# EAGLE board SparkFun_Ultrasonic_Sensor-Panel (EAGLE 9.6.2), part 1 of 5
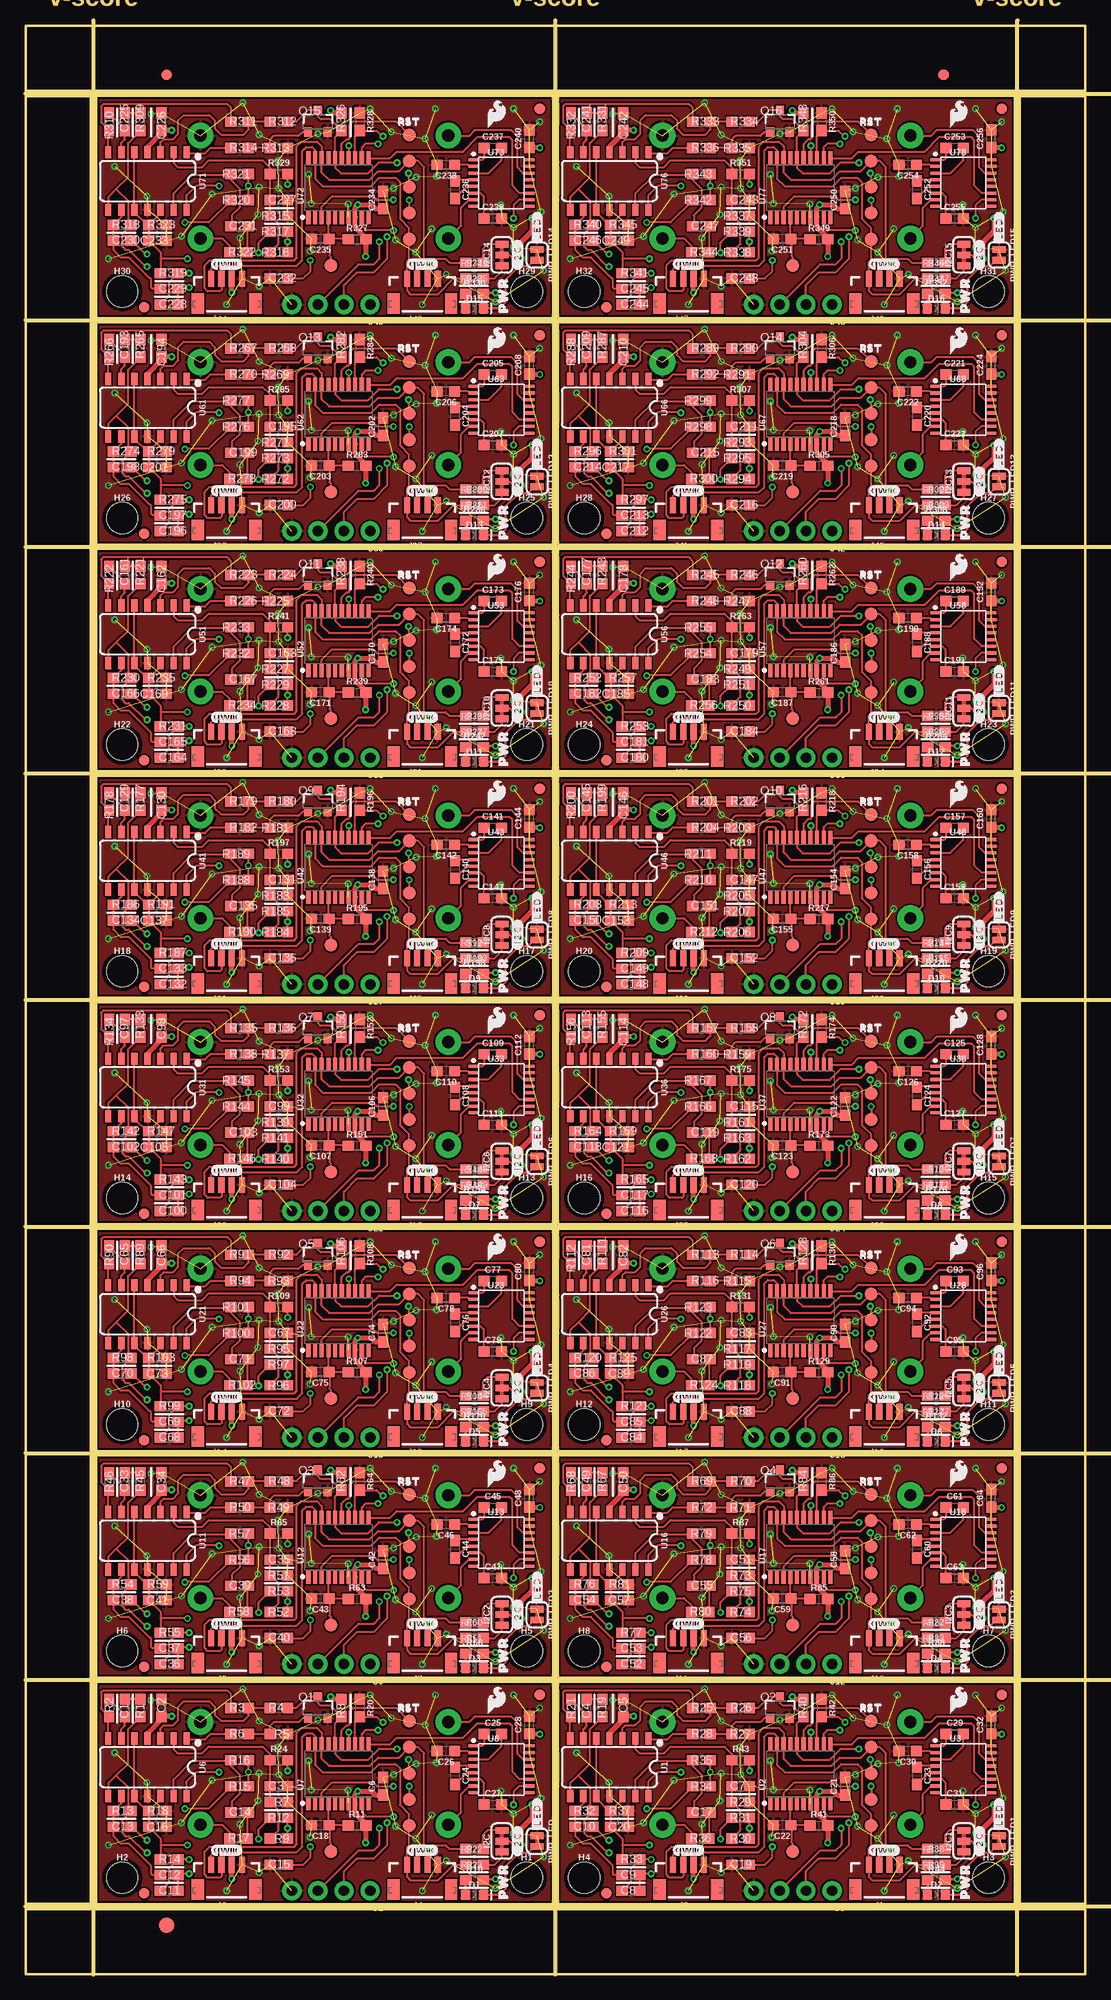
[diagram p0: board, top side]
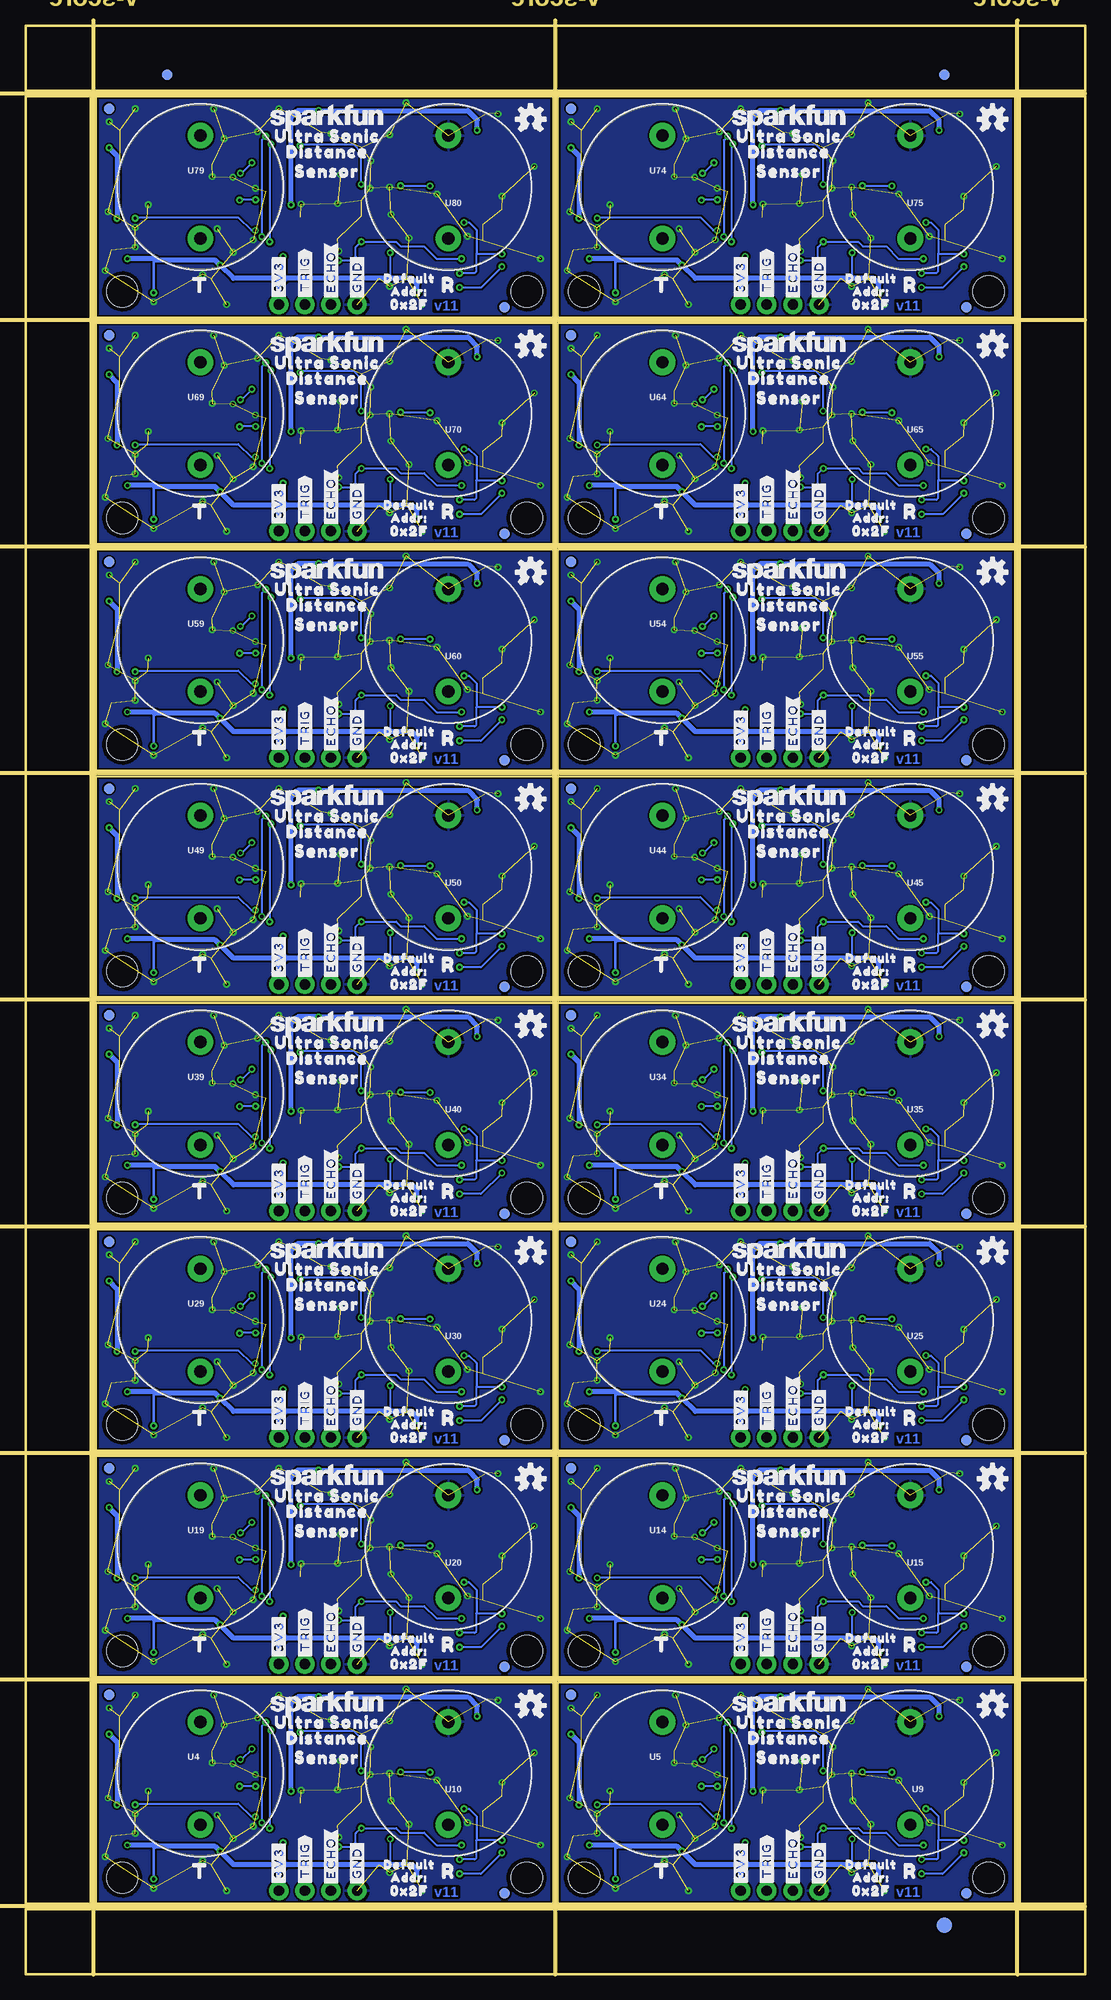
[diagram p1: board, bottom side, seen from below]

Size 103.12 x 189.59 mm. Coordinates in mm from the lower left corner, seen from the top.
Outline: 6.86,6.86 51.31,6.86 51.31,28.4 6.86,28.4 6.86,6.86
Outline: 51.82,6.86 96.27,6.86 96.27,28.4 51.82,28.4 51.82,6.86
Outline: 6.86,28.91 51.31,28.91 51.31,50.44 6.86,50.44 6.86,28.91
Outline: 51.82,28.91 96.27,28.91 96.27,50.44 51.82,50.44 51.82,28.91
Outline: 6.86,50.95 51.31,50.95 51.31,72.49 6.86,72.49 6.86,50.95
Outline: 51.82,50.95 96.27,50.95 96.27,72.49 51.82,72.49 51.82,50.95
Outline: 6.86,73 51.31,73 51.31,94.54 6.86,94.54 6.86,73
Outline: 51.82,73 96.27,73 96.27,94.54 51.82,94.54 51.82,73
Outline: 6.86,95.05 51.31,95.05 51.31,116.59 6.86,116.59 6.86,95.05
Outline: 51.82,95.05 96.27,95.05 96.27,116.59 51.82,116.59 51.82,95.05
Outline: 6.86,117.09 51.31,117.09 51.31,138.63 6.86,138.63 6.86,117.09
Outline: 51.82,117.09 96.27,117.09 96.27,138.63 51.82,138.63 51.82,117.09
Outline: 6.86,139.14 51.31,139.14 51.31,160.68 6.86,160.68 6.86,139.14
Outline: 51.82,139.14 96.27,139.14 96.27,160.68 51.82,160.68 51.82,139.14
Outline: 6.86,161.19 51.31,161.19 51.31,182.73 6.86,182.73 6.86,161.19
Outline: 51.82,161.19 96.27,161.19 96.27,182.73 51.82,182.73 51.82,161.19
Outline: 0,6.35 103.12,6.35 103.12,0 0,0 0,6.35
Outline: 96.77,182.73 103.12,182.73 103.12,6.86 96.77,6.86 96.77,182.73
Outline: 0,189.59 103.12,189.59 103.12,183.24 0,183.24 0,189.59
Outline: 0,182.73 6.35,182.73 6.35,6.86 0,6.86 0,182.73
Copper layers (1+16): Top 0.035559375mm / dielectric 0.47751875mm / Bottom 0.035559375mm
Design rules "SparkFun_Ultrasonic_Sensor": minimum track width 7mil, minimum drill 12mil, track to track 7mil, track to pad 7mil, pad to pad 7mil, via to via 7mil, smd to smd 7mil, copper to edge 7mil, drill to drill 7mil, minimum pad ring 7mil, minimum via ring 7mil, stop-mask expansion 3mil, vias tented up to drill 25mil, thermal gap 10mil
Milling: 12 lines

## Footprints (pad centres in the part's own frame; a part is rotated, then mirrored left to right if it is on the bottom)
0603 = smd 1.1 x 1: 1 -0.85,0; 2 0.85,0
LED-0603 = smd 1 x 1: A -0.877,0; C 0.877,0
FIDUCIAL-1X2 = smd 1 x 1: 1 0,0
FIDUCIAL-1.5X3 = smd 1.5 x 1.5: 1 0,0
STAND-OFF-TIGHT = hole 3.048: 0,0
SMT-JUMPER_3_2-NC_TRACE_SILK = smd 0.66 x 1.27: 1 -1.041,0; 2 0,0; 3 1.041,0
JST04_1MM_VERT = smd 0.6 x 1.55: 1 -1.5,0.775; 2 -0.5,0.775; 3 0.5,0.775; 4 1.5,0.775 | smd 1.2 x 2: NC1 -2.8,3.2; NC2 2.8,3.2
1X04_NO_SILK = drill 1.016 pad 1.88: 1 0,0; 2 2.54,0; 3 5.08,0; 4 7.62,0
SMT-JUMPER_2_NC_TRACE_SILK = smd 0.66 x 1.27: 1 -0.521,0; 2 0.521,0
SOT23-3 = smd 0.8 x 0.9: 1 -0.95,-1; 2 0.95,-1; 3 0,1.1
PAD.03X.05 = smd 1.27 x 1.27: 1 0,0
SO14 = smd 0.6 x 1.2: 1 -3.175,-2.8; 2 -1.905,-2.8; 3 -0.635,-2.8; 4 0.635,-2.8; 5 1.905,-2.8; 6 3.175,-2.8; 7 4.445,-2.8; 8 4.445,2.8; 9 3.175,2.8; 10 1.905,2.8; 11 0.635,2.8; 12 -0.635,2.8; 13 -1.905,2.8; 14 -3.175,2.8
TSSOP20 = smd 1.35 x 0.4: P1 -2.911,2.878; P2 -2.911,2.228; P3 -2.911,1.578; P4 -2.911,0.928; P5 -2.911,0.278; P6 -2.911,-0.372; P7 -2.911,-1.022; P8 -2.911,-1.672; P9 -2.911,-2.322; P10 -2.911,-2.972; P11 2.839,-2.972; P12 2.839,-2.322; P13 2.839,-1.672; P14 2.839,-1.022; P15 2.839,-0.372; P16 2.839,0.278; P17 2.839,0.928; P18 2.839,1.578; P19 2.839,2.228; P20 2.839,2.878
TSSOP16 = smd 1 x 0.3: P1 -2.607,2.153; P2 -2.607,1.503; P3 -2.607,0.853; P4 -2.607,0.203; P5 -2.607,-0.447; P6 -2.607,-1.097; P7 -2.607,-1.747; P8 -2.607,-2.397; P9 2.793,-2.397; P10 2.793,-1.747; P11 2.793,-1.097; P12 2.793,-0.447; P13 2.793,0.203; P14 2.793,0.853; P15 2.793,1.503; P16 2.793,2.153
CUSA-T80 = drill 1.2 pad 2.5: P1 0,5; P2 0,-5
CUSA-R80 = drill 1.2 pad 2.5: P1 0,5; P2 0,-5

## Placement (x,y rotation side)
C1  10nF  [0603]  9.65,25.91 90 top
C2  1.0uF  [0603]  13.21,25.91 270 top
C3  1nF  [0603]  24.64,18.29 0 top
C4  10nF  [0603]  54.61,25.91 90 top
C5  1.0uF  [0603]  58.17,25.91 270 top
C6  0.1uF  [0603]  34.8,18.29 90 top
C7  1nF  [0603]  69.6,18.29 0 top
C8  1nF  [0603]  58.93,8.13 0 top
C9  68pF  [0603]  58.93,9.65 0 top
C10  1nF  [0603]  54.36,14.35 0 top
C11  1nF  [0603]  13.97,8.13 0 top
C12  68pF  [0603]  13.97,9.65 0 top
C13  1nF  [0603]  9.4,14.35 0 top
C14  10nF  [0603]  20.83,15.75 0 top
C15  1.0uF  [0603]  24.64,10.67 0 top
C16  1nF  [0603]  12.83,14.35 180 top
C17  10nF  [0603]  65.79,15.75 0 top
C18  0.1uF  [0603]  28.68,14.5 180 top
C19  1.0uF  [0603]  69.6,10.67 0 top
C20  1nF  [0603]  57.78,14.35 180 top
C21  0.1uF  [0603]  79.76,18.29 90 top
C22  0.1uF  [0603]  73.63,14.5 180 top
C23  0.1uF  [0603]  86.74,19.3 270 top
C24  0.1uF  [0603]  41.78,19.3 270 top
C25  0.1uF  [0603]  45.47,23.37 0 top
C26  0.1uF  [0603]  40.89,21.72 180 top
C27  0.1uF  [0603]  45.47,16.51 0 top
C28  0.1uF  [0603]  49.02,24.26 90 top
C29  0.1uF  [0603]  90.42,23.37 0 top
C30  0.1uF  [0603]  85.85,21.72 180 top
C31  0.1uF  [0603]  90.42,16.51 0 top
C32  0.1uF  [0603]  93.98,24.26 90 top
C33  10nF  [0603]  9.65,47.96 90 top
C34  1.0uF  [0603]  13.21,47.96 270 top
C35  1nF  [0603]  24.64,40.34 0 top
C36  1nF  [0603]  13.97,30.18 0 top
C37  68pF  [0603]  13.97,31.7 0 top
C38  1nF  [0603]  9.4,36.4 0 top
C39  10nF  [0603]  20.83,37.8 0 top
C40  1.0uF  [0603]  24.64,32.72 0 top
C41  1nF  [0603]  12.83,36.4 180 top
C42  0.1uF  [0603]  34.8,40.34 90 top
C43  0.1uF  [0603]  28.68,36.55 180 top
C44  0.1uF  [0603]  41.78,41.35 270 top
C45  0.1uF  [0603]  45.47,45.42 0 top
C46  0.1uF  [0603]  40.89,43.76 180 top
C47  0.1uF  [0603]  45.47,38.56 0 top
C48  0.1uF  [0603]  49.02,46.3 90 top
C49  10nF  [0603]  54.61,47.96 90 top
C50  1.0uF  [0603]  58.17,47.96 270 top
C51  1nF  [0603]  69.6,40.34 0 top
C52  1nF  [0603]  58.93,30.18 0 top
C53  68pF  [0603]  58.93,31.7 0 top
C54  1nF  [0603]  54.36,36.4 0 top
C55  10nF  [0603]  65.79,37.8 0 top
C56  1.0uF  [0603]  69.6,32.72 0 top
C57  1nF  [0603]  57.78,36.4 180 top
C58  0.1uF  [0603]  79.76,40.34 90 top
C59  0.1uF  [0603]  73.63,36.55 180 top
C60  0.1uF  [0603]  86.74,41.35 270 top
C61  0.1uF  [0603]  90.42,45.42 0 top
C62  0.1uF  [0603]  85.85,43.76 180 top
C63  0.1uF  [0603]  90.42,38.56 0 top
C64  0.1uF  [0603]  93.98,46.3 90 top
C65  10nF  [0603]  9.65,70 90 top
C66  1.0uF  [0603]  13.21,70 270 top
C67  1nF  [0603]  24.64,62.38 0 top
C68  1nF  [0603]  13.97,52.22 0 top
C69  68pF  [0603]  13.97,53.75 0 top
C70  1nF  [0603]  9.4,58.45 0 top
C71  10nF  [0603]  20.83,59.84 0 top
C72  1.0uF  [0603]  24.64,54.76 0 top
C73  1nF  [0603]  12.83,58.45 180 top
C74  0.1uF  [0603]  34.8,62.38 90 top
C75  0.1uF  [0603]  28.68,58.6 180 top
C76  0.1uF  [0603]  41.78,63.4 270 top
C77  0.1uF  [0603]  45.47,67.46 0 top
C78  0.1uF  [0603]  40.89,65.81 180 top
C79  0.1uF  [0603]  45.47,60.6 0 top
C80  0.1uF  [0603]  49.02,68.35 90 top
C81  10nF  [0603]  54.61,70 90 top
C82  1.0uF  [0603]  58.17,70 270 top
C83  1nF  [0603]  69.6,62.38 0 top
C84  1nF  [0603]  58.93,52.22 0 top
C85  68pF  [0603]  58.93,53.75 0 top
C86  1nF  [0603]  54.36,58.45 0 top
C87  10nF  [0603]  65.79,59.84 0 top
C88  1.0uF  [0603]  69.6,54.76 0 top
C89  1nF  [0603]  57.78,58.45 180 top
C90  0.1uF  [0603]  79.76,62.38 90 top
C91  0.1uF  [0603]  73.63,58.6 180 top
C92  0.1uF  [0603]  86.74,63.4 270 top
C93  0.1uF  [0603]  90.42,67.46 0 top
C94  0.1uF  [0603]  85.85,65.81 180 top
C95  0.1uF  [0603]  90.42,60.6 0 top
C96  0.1uF  [0603]  93.98,68.35 90 top
C97  10nF  [0603]  9.65,92.05 90 top
C98  1.0uF  [0603]  13.21,92.05 270 top
C99  1nF  [0603]  24.64,84.43 0 top
C100  1nF  [0603]  13.97,74.27 0 top
C101  68pF  [0603]  13.97,75.79 0 top
C102  1nF  [0603]  9.4,80.49 0 top
C103  10nF  [0603]  20.83,81.89 0 top
C104  1.0uF  [0603]  24.64,76.81 0 top
C105  1nF  [0603]  12.83,80.49 180 top
C106  0.1uF  [0603]  34.8,84.43 90 top
C107  0.1uF  [0603]  28.68,80.65 180 top
C108  0.1uF  [0603]  41.78,85.45 270 top
C109  0.1uF  [0603]  45.47,89.51 0 top
C110  0.1uF  [0603]  40.89,87.86 180 top
C111  0.1uF  [0603]  45.47,82.65 0 top
C112  0.1uF  [0603]  49.02,90.4 90 top
C113  10nF  [0603]  54.61,92.05 90 top
C114  1.0uF  [0603]  58.17,92.05 270 top
C115  1nF  [0603]  69.6,84.43 0 top
C116  1nF  [0603]  58.93,74.27 0 top
C117  68pF  [0603]  58.93,75.79 0 top
C118  1nF  [0603]  54.36,80.49 0 top
C119  10nF  [0603]  65.79,81.89 0 top
C120  1.0uF  [0603]  69.6,76.81 0 top
C121  1nF  [0603]  57.78,80.49 180 top
C122  0.1uF  [0603]  79.76,84.43 90 top
C123  0.1uF  [0603]  73.63,80.65 180 top
C124  0.1uF  [0603]  86.74,85.45 270 top
C125  0.1uF  [0603]  90.42,89.51 0 top
C126  0.1uF  [0603]  85.85,87.86 180 top
C127  0.1uF  [0603]  90.42,82.65 0 top
C128  0.1uF  [0603]  93.98,90.4 90 top
C129  10nF  [0603]  9.65,114.1 90 top
C130  1.0uF  [0603]  13.21,114.1 270 top
C131  1nF  [0603]  24.64,106.48 0 top
C132  1nF  [0603]  13.97,96.32 0 top
C133  68pF  [0603]  13.97,97.84 0 top
C134  1nF  [0603]  9.4,102.54 0 top
C135  10nF  [0603]  20.83,103.94 0 top
C136  1.0uF  [0603]  24.64,98.86 0 top
C137  1nF  [0603]  12.83,102.54 180 top
C138  0.1uF  [0603]  34.8,106.48 90 top
C139  0.1uF  [0603]  28.68,102.69 180 top
C140  0.1uF  [0603]  41.78,107.49 270 top
C141  0.1uF  [0603]  45.47,111.56 0 top
C142  0.1uF  [0603]  40.89,109.91 180 top
C143  0.1uF  [0603]  45.47,104.7 0 top
C144  0.1uF  [0603]  49.02,112.45 90 top
C145  10nF  [0603]  54.61,114.1 90 top
C146  1.0uF  [0603]  58.17,114.1 270 top
C147  1nF  [0603]  69.6,106.48 0 top
C148  1nF  [0603]  58.93,96.32 0 top
C149  68pF  [0603]  58.93,97.84 0 top
C150  1nF  [0603]  54.36,102.54 0 top
C151  10nF  [0603]  65.79,103.94 0 top
C152  1.0uF  [0603]  69.6,98.86 0 top
C153  1nF  [0603]  57.78,102.54 180 top
C154  0.1uF  [0603]  79.76,106.48 90 top
C155  0.1uF  [0603]  73.63,102.69 180 top
C156  0.1uF  [0603]  86.74,107.49 270 top
C157  0.1uF  [0603]  90.42,111.56 0 top
C158  0.1uF  [0603]  85.85,109.91 180 top
C159  0.1uF  [0603]  90.42,104.7 0 top
C160  0.1uF  [0603]  93.98,112.45 90 top
C161  10nF  [0603]  9.65,136.14 90 top
C162  1.0uF  [0603]  13.21,136.14 270 top
C163  1nF  [0603]  24.64,128.52 0 top
C164  1nF  [0603]  13.97,118.36 0 top
C165  68pF  [0603]  13.97,119.89 0 top
C166  1nF  [0603]  9.4,124.59 0 top
C167  10nF  [0603]  20.83,125.98 0 top
C168  1.0uF  [0603]  24.64,120.9 0 top
C169  1nF  [0603]  12.83,124.59 180 top
C170  0.1uF  [0603]  34.8,128.52 90 top
C171  0.1uF  [0603]  28.68,124.74 180 top
C172  0.1uF  [0603]  41.78,129.54 270 top
C173  0.1uF  [0603]  45.47,133.6 0 top
C174  0.1uF  [0603]  40.89,131.95 180 top
C175  0.1uF  [0603]  45.47,126.75 0 top
C176  0.1uF  [0603]  49.02,134.49 90 top
C177  10nF  [0603]  54.61,136.14 90 top
C178  1.0uF  [0603]  58.17,136.14 270 top
C179  1nF  [0603]  69.6,128.52 0 top
C180  1nF  [0603]  58.93,118.36 0 top
C181  68pF  [0603]  58.93,119.89 0 top
C182  1nF  [0603]  54.36,124.59 0 top
C183  10nF  [0603]  65.79,125.98 0 top
C184  1.0uF  [0603]  69.6,120.9 0 top
C185  1nF  [0603]  57.78,124.59 180 top
C186  0.1uF  [0603]  79.76,128.52 90 top
C187  0.1uF  [0603]  73.63,124.74 180 top
C188  0.1uF  [0603]  86.74,129.54 270 top
C189  0.1uF  [0603]  90.42,133.6 0 top
C190  0.1uF  [0603]  85.85,131.95 180 top
C191  0.1uF  [0603]  90.42,126.75 0 top
C192  0.1uF  [0603]  93.98,134.49 90 top
C193  10nF  [0603]  9.65,158.19 90 top
C194  1.0uF  [0603]  13.21,158.19 270 top
C195  1nF  [0603]  24.64,150.57 0 top
C196  1nF  [0603]  13.97,140.41 0 top
C197  68pF  [0603]  13.97,141.94 0 top
C198  1nF  [0603]  9.4,146.63 0 top
C199  10nF  [0603]  20.83,148.03 0 top
C200  1.0uF  [0603]  24.64,142.95 0 top
C201  1nF  [0603]  12.83,146.63 180 top
C202  0.1uF  [0603]  34.8,150.57 90 top
C203  0.1uF  [0603]  28.68,146.79 180 top
C204  0.1uF  [0603]  41.78,151.59 270 top
C205  0.1uF  [0603]  45.47,155.65 0 top
C206  0.1uF  [0603]  40.89,154 180 top
C207  0.1uF  [0603]  45.47,148.79 0 top
C208  0.1uF  [0603]  49.02,156.54 90 top
C209  10nF  [0603]  54.61,158.19 90 top
C210  1.0uF  [0603]  58.17,158.19 270 top
C211  1nF  [0603]  69.6,150.57 0 top
C212  1nF  [0603]  58.93,140.41 0 top
C213  68pF  [0603]  58.93,141.94 0 top
C214  1nF  [0603]  54.36,146.63 0 top
C215  10nF  [0603]  65.79,148.03 0 top
C216  1.0uF  [0603]  69.6,142.95 0 top
C217  1nF  [0603]  57.78,146.63 180 top
C218  0.1uF  [0603]  79.76,150.57 90 top
C219  0.1uF  [0603]  73.63,146.79 180 top
C220  0.1uF  [0603]  86.74,151.59 270 top
C221  0.1uF  [0603]  90.42,155.65 0 top
C222  0.1uF  [0603]  85.85,154 180 top
C223  0.1uF  [0603]  90.42,148.79 0 top
C224  0.1uF  [0603]  93.98,156.54 90 top
C225  10nF  [0603]  9.65,180.24 90 top
C226  1.0uF  [0603]  13.21,180.24 270 top
C227  1nF  [0603]  24.64,172.62 0 top
C228  1nF  [0603]  13.97,162.46 0 top
C229  68pF  [0603]  13.97,163.98 0 top
C230  1nF  [0603]  9.4,168.68 0 top
C231  10nF  [0603]  20.83,170.08 0 top
C232  1.0uF  [0603]  24.64,165 0 top
C233  1nF  [0603]  12.83,168.68 180 top
C234  0.1uF  [0603]  34.8,172.62 90 top
C235  0.1uF  [0603]  28.68,168.83 180 top
C236  0.1uF  [0603]  41.78,173.63 270 top
C237  0.1uF  [0603]  45.47,177.7 0 top
C238  0.1uF  [0603]  40.89,176.05 180 top
C239  0.1uF  [0603]  45.47,170.84 0 top
C240  0.1uF  [0603]  49.02,178.59 90 top
C241  10nF  [0603]  54.61,180.24 90 top
C242  1.0uF  [0603]  58.17,180.24 270 top
C243  1nF  [0603]  69.6,172.62 0 top
C244  1nF  [0603]  58.93,162.46 0 top
C245  68pF  [0603]  58.93,163.98 0 top
C246  1nF  [0603]  54.36,168.68 0 top
C247  10nF  [0603]  65.79,170.08 0 top
C248  1.0uF  [0603]  69.6,165 0 top
C249  1nF  [0603]  57.78,168.68 180 top
C250  0.1uF  [0603]  79.76,172.62 90 top
C251  0.1uF  [0603]  73.63,168.83 180 top
C252  0.1uF  [0603]  86.74,173.63 270 top
C253  0.1uF  [0603]  90.42,177.7 0 top
C254  0.1uF  [0603]  85.85,176.05 180 top
C255  0.1uF  [0603]  90.42,170.84 0 top
C256  0.1uF  [0603]  93.98,178.59 90 top
D1  Red  [LED-0603]  43.69,7.75 0 top
D2  Red  [LED-0603]  88.65,7.75 0 top
D3  Red  [LED-0603]  43.69,29.79 0 top
D4  Red  [LED-0603]  88.65,29.79 0 top
D5  Red  [LED-0603]  43.69,51.84 0 top
D6  Red  [LED-0603]  88.65,51.84 0 top
D7  Red  [LED-0603]  43.69,73.89 0 top
D8  Red  [LED-0603]  88.65,73.89 0 top
D9  Red  [LED-0603]  43.69,95.94 0 top
D10  Red  [LED-0603]  88.65,95.94 0 top
D11  Red  [LED-0603]  43.69,117.98 0 top
D12  Red  [LED-0603]  88.65,117.98 0 top
D13  Red  [LED-0603]  43.69,140.03 0 top
D14  Red  [LED-0603]  88.65,140.03 0 top
D15  Red  [LED-0603]  43.69,162.08 0 top
D16  Red  [LED-0603]  88.65,162.08 0 top
E$1  [FIDUCIAL-1X2]  13.72,184.82 0 top
E$2  [FIDUCIAL-1X2]  13.72,184.82 0 bottom
E$3  [FIDUCIAL-1X2]  89.34,184.82 0 top
E$4  [FIDUCIAL-1X2]  89.34,184.82 0 bottom
E$5  [FIDUCIAL-1.5X3]  13.72,4.76 0 top
E$6  [FIDUCIAL-1.5X3]  13.72,4.76 0 bottom
FD1  FIDUCIAL1X2  [FIDUCIAL-1X2]  11.56,7.87 90 top
FD2  FIDUCIAL1X2  [FIDUCIAL-1X2]  50.04,27.18 90 top
FD3  FIDUCIAL1X2  [FIDUCIAL-1X2]  50.04,27.18 90 bottom
FD4  FIDUCIAL1X2  [FIDUCIAL-1X2]  11.56,7.87 90 bottom
FD5  FIDUCIAL1X2  [FIDUCIAL-1X2]  56.51,7.87 90 top
FD6  FIDUCIAL1X2  [FIDUCIAL-1X2]  95,27.18 90 top
FD7  FIDUCIAL1X2  [FIDUCIAL-1X2]  95,27.18 90 bottom
FD8  FIDUCIAL1X2  [FIDUCIAL-1X2]  56.51,7.87 90 bottom
FD9  FIDUCIAL1X2  [FIDUCIAL-1X2]  11.56,29.92 90 top
FD10  FIDUCIAL1X2  [FIDUCIAL-1X2]  50.04,49.23 90 top
FD11  FIDUCIAL1X2  [FIDUCIAL-1X2]  50.04,49.23 90 bottom
FD12  FIDUCIAL1X2  [FIDUCIAL-1X2]  11.56,29.92 90 bottom
FD13  FIDUCIAL1X2  [FIDUCIAL-1X2]  56.51,29.92 90 top
FD14  FIDUCIAL1X2  [FIDUCIAL-1X2]  95,49.23 90 top
FD15  FIDUCIAL1X2  [FIDUCIAL-1X2]  95,49.23 90 bottom
FD16  FIDUCIAL1X2  [FIDUCIAL-1X2]  56.51,29.92 90 bottom
FD17  FIDUCIAL1X2  [FIDUCIAL-1X2]  11.56,51.97 90 top
FD18  FIDUCIAL1X2  [FIDUCIAL-1X2]  50.04,71.27 90 top
FD19  FIDUCIAL1X2  [FIDUCIAL-1X2]  50.04,71.27 90 bottom
FD20  FIDUCIAL1X2  [FIDUCIAL-1X2]  11.56,51.97 90 bottom
FD21  FIDUCIAL1X2  [FIDUCIAL-1X2]  56.51,51.97 90 top
FD22  FIDUCIAL1X2  [FIDUCIAL-1X2]  95,71.27 90 top
FD23  FIDUCIAL1X2  [FIDUCIAL-1X2]  95,71.27 90 bottom
FD24  FIDUCIAL1X2  [FIDUCIAL-1X2]  56.51,51.97 90 bottom
FD25  FIDUCIAL1X2  [FIDUCIAL-1X2]  11.56,74.02 90 top
FD26  FIDUCIAL1X2  [FIDUCIAL-1X2]  50.04,93.32 90 top
FD27  FIDUCIAL1X2  [FIDUCIAL-1X2]  50.04,93.32 90 bottom
FD28  FIDUCIAL1X2  [FIDUCIAL-1X2]  11.56,74.02 90 bottom
FD29  FIDUCIAL1X2  [FIDUCIAL-1X2]  56.51,74.02 90 top
FD30  FIDUCIAL1X2  [FIDUCIAL-1X2]  95,93.32 90 top
FD31  FIDUCIAL1X2  [FIDUCIAL-1X2]  95,93.32 90 bottom
FD32  FIDUCIAL1X2  [FIDUCIAL-1X2]  56.51,74.02 90 bottom
FD33  FIDUCIAL1X2  [FIDUCIAL-1X2]  11.56,96.06 90 top
FD34  FIDUCIAL1X2  [FIDUCIAL-1X2]  50.04,115.37 90 top
FD35  FIDUCIAL1X2  [FIDUCIAL-1X2]  50.04,115.37 90 bottom
FD36  FIDUCIAL1X2  [FIDUCIAL-1X2]  11.56,96.06 90 bottom
FD37  FIDUCIAL1X2  [FIDUCIAL-1X2]  56.51,96.06 90 top
FD38  FIDUCIAL1X2  [FIDUCIAL-1X2]  95,115.37 90 top
FD39  FIDUCIAL1X2  [FIDUCIAL-1X2]  95,115.37 90 bottom
FD40  FIDUCIAL1X2  [FIDUCIAL-1X2]  56.51,96.06 90 bottom
FD41  FIDUCIAL1X2  [FIDUCIAL-1X2]  11.56,118.11 90 top
FD42  FIDUCIAL1X2  [FIDUCIAL-1X2]  50.04,137.41 90 top
FD43  FIDUCIAL1X2  [FIDUCIAL-1X2]  50.04,137.41 90 bottom
FD44  FIDUCIAL1X2  [FIDUCIAL-1X2]  11.56,118.11 90 bottom
FD45  FIDUCIAL1X2  [FIDUCIAL-1X2]  56.51,118.11 90 top
FD46  FIDUCIAL1X2  [FIDUCIAL-1X2]  95,137.41 90 top
FD47  FIDUCIAL1X2  [FIDUCIAL-1X2]  95,137.41 90 bottom
FD48  FIDUCIAL1X2  [FIDUCIAL-1X2]  56.51,118.11 90 bottom
FD49  FIDUCIAL1X2  [FIDUCIAL-1X2]  11.56,140.16 90 top
FD50  FIDUCIAL1X2  [FIDUCIAL-1X2]  50.04,159.46 90 top
FD51  FIDUCIAL1X2  [FIDUCIAL-1X2]  50.04,159.46 90 bottom
FD52  FIDUCIAL1X2  [FIDUCIAL-1X2]  11.56,140.16 90 bottom
FD53  FIDUCIAL1X2  [FIDUCIAL-1X2]  56.51,140.16 90 top
FD54  FIDUCIAL1X2  [FIDUCIAL-1X2]  95,159.46 90 top
FD55  FIDUCIAL1X2  [FIDUCIAL-1X2]  95,159.46 90 bottom
FD56  FIDUCIAL1X2  [FIDUCIAL-1X2]  56.51,140.16 90 bottom
FD57  FIDUCIAL1X2  [FIDUCIAL-1X2]  11.56,162.2 90 top
FD58  FIDUCIAL1X2  [FIDUCIAL-1X2]  50.04,181.51 90 top
FD59  FIDUCIAL1X2  [FIDUCIAL-1X2]  50.04,181.51 90 bottom
FD60  FIDUCIAL1X2  [FIDUCIAL-1X2]  11.56,162.2 90 bottom
FD61  FIDUCIAL1X2  [FIDUCIAL-1X2]  56.51,162.2 90 top
FD62  FIDUCIAL1X2  [FIDUCIAL-1X2]  95,181.51 90 top
FD63  FIDUCIAL1X2  [FIDUCIAL-1X2]  95,181.51 90 bottom
FD64  FIDUCIAL1X2  [FIDUCIAL-1X2]  56.51,162.2 90 bottom
H1  STAND-OFFTIGHT  [STAND-OFF-TIGHT]  48.77,9.4 0 top
H2  STAND-OFFTIGHT  [STAND-OFF-TIGHT]  9.4,9.4 0 top
H3  STAND-OFFTIGHT  [STAND-OFF-TIGHT]  93.73,9.4 0 top
H4  STAND-OFFTIGHT  [STAND-OFF-TIGHT]  54.36,9.4 0 top
H5  STAND-OFFTIGHT  [STAND-OFF-TIGHT]  48.77,31.45 0 top
H6  STAND-OFFTIGHT  [STAND-OFF-TIGHT]  9.4,31.45 0 top
H7  STAND-OFFTIGHT  [STAND-OFF-TIGHT]  93.73,31.45 0 top
H8  STAND-OFFTIGHT  [STAND-OFF-TIGHT]  54.36,31.45 0 top
H9  STAND-OFFTIGHT  [STAND-OFF-TIGHT]  48.77,53.49 0 top
H10  STAND-OFFTIGHT  [STAND-OFF-TIGHT]  9.4,53.49 0 top
H11  STAND-OFFTIGHT  [STAND-OFF-TIGHT]  93.73,53.49 0 top
H12  STAND-OFFTIGHT  [STAND-OFF-TIGHT]  54.36,53.49 0 top
H13  STAND-OFFTIGHT  [STAND-OFF-TIGHT]  48.77,75.54 0 top
H14  STAND-OFFTIGHT  [STAND-OFF-TIGHT]  9.4,75.54 0 top
H15  STAND-OFFTIGHT  [STAND-OFF-TIGHT]  93.73,75.54 0 top
H16  STAND-OFFTIGHT  [STAND-OFF-TIGHT]  54.36,75.54 0 top
H17  STAND-OFFTIGHT  [STAND-OFF-TIGHT]  48.77,97.59 0 top
H18  STAND-OFFTIGHT  [STAND-OFF-TIGHT]  9.4,97.59 0 top
H19  STAND-OFFTIGHT  [STAND-OFF-TIGHT]  93.73,97.59 0 top
H20  STAND-OFFTIGHT  [STAND-OFF-TIGHT]  54.36,97.59 0 top
H21  STAND-OFFTIGHT  [STAND-OFF-TIGHT]  48.77,119.63 0 top
H22  STAND-OFFTIGHT  [STAND-OFF-TIGHT]  9.4,119.63 0 top
H23  STAND-OFFTIGHT  [STAND-OFF-TIGHT]  93.73,119.63 0 top
H24  STAND-OFFTIGHT  [STAND-OFF-TIGHT]  54.36,119.63 0 top
H25  STAND-OFFTIGHT  [STAND-OFF-TIGHT]  48.77,141.68 0 top
H26  STAND-OFFTIGHT  [STAND-OFF-TIGHT]  9.4,141.68 0 top
H27  STAND-OFFTIGHT  [STAND-OFF-TIGHT]  93.73,141.68 0 top
H28  STAND-OFFTIGHT  [STAND-OFF-TIGHT]  54.36,141.68 0 top
H29  STAND-OFFTIGHT  [STAND-OFF-TIGHT]  48.77,163.73 0 top
H30  STAND-OFFTIGHT  [STAND-OFF-TIGHT]  9.4,163.73 0 top
H31  STAND-OFFTIGHT  [STAND-OFF-TIGHT]  93.73,163.73 0 top
H32  STAND-OFFTIGHT  [STAND-OFF-TIGHT]  54.36,163.73 0 top
I2C  JUMPER-SMT_3_2-NC_TRACE_SILK  [SMT-JUMPER_3_2-NC_TRACE_SILK]  46.35,12.95 90 top
I2C1  JUMPER-SMT_3_2-NC_TRACE_SILK  [SMT-JUMPER_3_2-NC_TRACE_SILK]  91.31,12.95 90 top
I2C2  JUMPER-SMT_3_2-NC_TRACE_SILK  [SMT-JUMPER_3_2-NC_TRACE_SILK]  46.35,35 90 top
I2C3  JUMPER-SMT_3_2-NC_TRACE_SILK  [SMT-JUMPER_3_2-NC_TRACE_SILK]  91.31,35 90 top
I2C4  JUMPER-SMT_3_2-NC_TRACE_SILK  [SMT-JUMPER_3_2-NC_TRACE_SILK]  46.35,57.05 90 top
I2C5  JUMPER-SMT_3_2-NC_TRACE_SILK  [SMT-JUMPER_3_2-NC_TRACE_SILK]  91.31,57.05 90 top
I2C6  JUMPER-SMT_3_2-NC_TRACE_SILK  [SMT-JUMPER_3_2-NC_TRACE_SILK]  46.35,79.1 90 top
I2C7  JUMPER-SMT_3_2-NC_TRACE_SILK  [SMT-JUMPER_3_2-NC_TRACE_SILK]  91.31,79.1 90 top
I2C8  JUMPER-SMT_3_2-NC_TRACE_SILK  [SMT-JUMPER_3_2-NC_TRACE_SILK]  46.35,101.14 90 top
I2C9  JUMPER-SMT_3_2-NC_TRACE_SILK  [SMT-JUMPER_3_2-NC_TRACE_SILK]  91.31,101.14 90 top
I2C10  JUMPER-SMT_3_2-NC_TRACE_SILK  [SMT-JUMPER_3_2-NC_TRACE_SILK]  46.35,123.19 90 top
I2C11  JUMPER-SMT_3_2-NC_TRACE_SILK  [SMT-JUMPER_3_2-NC_TRACE_SILK]  91.31,123.19 90 top
I2C12  JUMPER-SMT_3_2-NC_TRACE_SILK  [SMT-JUMPER_3_2-NC_TRACE_SILK]  46.35,145.24 90 top
I2C13  JUMPER-SMT_3_2-NC_TRACE_SILK  [SMT-JUMPER_3_2-NC_TRACE_SILK]  91.31,145.24 90 top
I2C14  JUMPER-SMT_3_2-NC_TRACE_SILK  [SMT-JUMPER_3_2-NC_TRACE_SILK]  46.35,167.28 90 top
I2C15  JUMPER-SMT_3_2-NC_TRACE_SILK  [SMT-JUMPER_3_2-NC_TRACE_SILK]  91.31,167.28 90 top
J1  Vertical Qwiic Connector  [JST04_1MM_VERT]  83.57,11.43 180 top
J2  [1X04_NO_SILK]  33.53,8.13 180 top
J3  Vertical Qwiic Connector  [JST04_1MM_VERT]  64.52,11.43 180 top
J4  Vertical Qwiic Connector  [JST04_1MM_VERT]  38.61,11.43 180 top
J5  [1X04_NO_SILK]  78.49,8.13 180 top
J6  Vertical Qwiic Connector  [JST04_1MM_VERT]  19.56,11.43 180 top
J7  Vertical Qwiic Connector  [JST04_1MM_VERT]  38.61,33.48 180 top
J8  Vertical Qwiic Connector  [JST04_1MM_VERT]  19.56,33.48 180 top
J9  [1X04_NO_SILK]  33.53,30.18 180 top
J10  Vertical Qwiic Connector  [JST04_1MM_VERT]  83.57,33.48 180 top
J11  Vertical Qwiic Connector  [JST04_1MM_VERT]  64.52,33.48 180 top
J12  [1X04_NO_SILK]  78.49,30.18 180 top
J13  Vertical Qwiic Connector  [JST04_1MM_VERT]  38.61,55.52 180 top
J14  Vertical Qwiic Connector  [JST04_1MM_VERT]  19.56,55.52 180 top
J15  [1X04_NO_SILK]  33.53,52.22 180 top
J16  Vertical Qwiic Connector  [JST04_1MM_VERT]  83.57,55.52 180 top
J17  Vertical Qwiic Connector  [JST04_1MM_VERT]  64.52,55.52 180 top
J18  [1X04_NO_SILK]  78.49,52.22 180 top
J19  Vertical Qwiic Connector  [JST04_1MM_VERT]  38.61,77.57 180 top
J20  Vertical Qwiic Connector  [JST04_1MM_VERT]  19.56,77.57 180 top
J21  [1X04_NO_SILK]  33.53,74.27 180 top
J22  Vertical Qwiic Connector  [JST04_1MM_VERT]  83.57,77.57 180 top
J23  Vertical Qwiic Connector  [JST04_1MM_VERT]  64.52,77.57 180 top
J24  [1X04_NO_SILK]  78.49,74.27 180 top
J25  Vertical Qwiic Connector  [JST04_1MM_VERT]  38.61,99.62 180 top
J26  Vertical Qwiic Connector  [JST04_1MM_VERT]  19.56,99.62 180 top
J27  [1X04_NO_SILK]  33.53,96.32 180 top
J28  Vertical Qwiic Connector  [JST04_1MM_VERT]  83.57,99.62 180 top
J29  Vertical Qwiic Connector  [JST04_1MM_VERT]  64.52,99.62 180 top
J30  [1X04_NO_SILK]  78.49,96.32 180 top
J31  Vertical Qwiic Connector  [JST04_1MM_VERT]  38.61,121.67 180 top
J32  Vertical Qwiic Connector  [JST04_1MM_VERT]  19.56,121.67 180 top
J33  [1X04_NO_SILK]  33.53,118.36 180 top
J34  Vertical Qwiic Connector  [JST04_1MM_VERT]  83.57,121.67 180 top
J35  Vertical Qwiic Connector  [JST04_1MM_VERT]  64.52,121.67 180 top
J36  [1X04_NO_SILK]  78.49,118.36 180 top
J37  Vertical Qwiic Connector  [JST04_1MM_VERT]  38.61,143.71 180 top
J38  Vertical Qwiic Connector  [JST04_1MM_VERT]  19.56,143.71 180 top
J39  [1X04_NO_SILK]  33.53,140.41 180 top
J40  Vertical Qwiic Connector  [JST04_1MM_VERT]  83.57,143.71 180 top
J41  Vertical Qwiic Connector  [JST04_1MM_VERT]  64.52,143.71 180 top
J42  [1X04_NO_SILK]  78.49,140.41 180 top
J43  Vertical Qwiic Connector  [JST04_1MM_VERT]  38.61,165.76 180 top
J44  Vertical Qwiic Connector  [JST04_1MM_VERT]  19.56,165.76 180 top
J45  [1X04_NO_SILK]  33.53,162.46 180 top
J46  Vertical Qwiic Connector  [JST04_1MM_VERT]  83.57,165.76 180 top
J47  Vertical Qwiic Connector  [JST04_1MM_VERT]  64.52,165.76 180 top
J48  [1X04_NO_SILK]  78.49,162.46 180 top
LOGO1  SFE_LOGO_NAME.1_INCH  [SFE_LOGO_NAME_.1]  73.79,26.16 0 bottom
LOGO2  SFE_LOGO_NAME.1_INCH  [SFE_LOGO_NAME_.1]  28.83,26.16 0 bottom
LOGO3  QWIIC_LOGO_3MM  [QWIIC_3MM]  19.56,12.06 0 top
LOGO4  OSHW-LOGOS  [OSHW-LOGO-S]  9.02,26.16 0 bottom
LOGO5  QWIIC_LOGO_3MM  [QWIIC_3MM]  64.52,12.06 0 top
LOGO6  OSHW-LOGOS  [OSHW-LOGO-S]  53.97,26.16 0 bottom
LOGO7  SFE_LOGO_NAME.1_INCH  [SFE_LOGO_NAME_.1]  28.83,48.21 0 bottom
LOGO8  QWIIC_LOGO_3MM  [QWIIC_3MM]  19.56,34.11 0 top
LOGO9  OSHW-LOGOS  [OSHW-LOGO-S]  9.02,48.21 0 bottom
LOGO10  SFE_LOGO_NAME.1_INCH  [SFE_LOGO_NAME_.1]  73.79,48.21 0 bottom
LOGO11  QWIIC_LOGO_3MM  [QWIIC_3MM]  64.52,34.11 0 top
LOGO12  OSHW-LOGOS  [OSHW-LOGO-S]  53.97,48.21 0 bottom
LOGO13  SFE_LOGO_NAME.1_INCH  [SFE_LOGO_NAME_.1]  28.83,70.26 0 bottom
LOGO14  QWIIC_LOGO_3MM  [QWIIC_3MM]  19.56,56.16 0 top
LOGO15  OSHW-LOGOS  [OSHW-LOGO-S]  9.02,70.26 0 bottom
LOGO16  SFE_LOGO_NAME.1_INCH  [SFE_LOGO_NAME_.1]  73.79,70.26 0 bottom
LOGO17  QWIIC_LOGO_3MM  [QWIIC_3MM]  64.52,56.16 0 top
LOGO18  OSHW-LOGOS  [OSHW-LOGO-S]  53.97,70.26 0 bottom
LOGO19  SFE_LOGO_NAME.1_INCH  [SFE_LOGO_NAME_.1]  28.83,92.3 0 bottom
LOGO20  QWIIC_LOGO_3MM  [QWIIC_3MM]  19.56,78.21 0 top
LOGO21  OSHW-LOGOS  [OSHW-LOGO-S]  9.02,92.3 0 bottom
LOGO22  SFE_LOGO_NAME.1_INCH  [SFE_LOGO_NAME_.1]  73.79,92.3 0 bottom
LOGO23  QWIIC_LOGO_3MM  [QWIIC_3MM]  64.52,78.21 0 top
LOGO24  OSHW-LOGOS  [OSHW-LOGO-S]  53.97,92.3 0 bottom
LOGO25  SFE_LOGO_NAME.1_INCH  [SFE_LOGO_NAME_.1]  28.83,114.35 0 bottom
LOGO26  QWIIC_LOGO_3MM  [QWIIC_3MM]  19.56,100.25 0 top
LOGO27  OSHW-LOGOS  [OSHW-LOGO-S]  9.02,114.35 0 bottom
LOGO28  SFE_LOGO_NAME.1_INCH  [SFE_LOGO_NAME_.1]  73.79,114.35 0 bottom
LOGO29  QWIIC_LOGO_3MM  [QWIIC_3MM]  64.52,100.25 0 top
LOGO30  OSHW-LOGOS  [OSHW-LOGO-S]  53.97,114.35 0 bottom
LOGO31  SFE_LOGO_NAME.1_INCH  [SFE_LOGO_NAME_.1]  28.83,136.4 0 bottom
LOGO32  QWIIC_LOGO_3MM  [QWIIC_3MM]  19.56,122.3 0 top
LOGO33  OSHW-LOGOS  [OSHW-LOGO-S]  9.02,136.4 0 bottom
LOGO34  SFE_LOGO_NAME.1_INCH  [SFE_LOGO_NAME_.1]  73.79,136.4 0 bottom
LOGO35  QWIIC_LOGO_3MM  [QWIIC_3MM]  64.52,122.3 0 top
LOGO36  OSHW-LOGOS  [OSHW-LOGO-S]  53.97,136.4 0 bottom
LOGO37  SFE_LOGO_NAME.1_INCH  [SFE_LOGO_NAME_.1]  28.83,158.45 0 bottom
LOGO38  QWIIC_LOGO_3MM  [QWIIC_3MM]  19.56,144.35 0 top
LOGO39  OSHW-LOGOS  [OSHW-LOGO-S]  9.02,158.45 0 bottom
LOGO40  SFE_LOGO_NAME.1_INCH  [SFE_LOGO_NAME_.1]  73.79,158.45 0 bottom
LOGO41  QWIIC_LOGO_3MM  [QWIIC_3MM]  64.52,144.35 0 top
LOGO42  OSHW-LOGOS  [OSHW-LOGO-S]  53.97,158.45 0 bottom
LOGO43  SFE_LOGO_NAME.1_INCH  [SFE_LOGO_NAME_.1]  28.83,180.49 0 bottom
LOGO44  QWIIC_LOGO_3MM  [QWIIC_3MM]  19.56,166.4 0 top
LOGO45  OSHW-LOGOS  [OSHW-LOGO-S]  9.02,180.49 0 bottom
LOGO46  SFE_LOGO_NAME.1_INCH  [SFE_LOGO_NAME_.1]  73.79,180.49 0 bottom
LOGO47  QWIIC_LOGO_3MM  [QWIIC_3MM]  64.52,166.4 0 top
LOGO48  OSHW-LOGOS  [OSHW-LOGO-S]  53.97,180.49 0 bottom
PWR_LED  JUMPER-SMT_2_NC_TRACE_SILK  [SMT-JUMPER_2_NC_TRACE_SILK]  49.78,12.95 270 top
PWR_LED1  JUMPER-SMT_2_NC_TRACE_SILK  [SMT-JUMPER_2_NC_TRACE_SILK]  94.74,12.95 270 top
PWR_LED2  JUMPER-SMT_2_NC_TRACE_SILK  [SMT-JUMPER_2_NC_TRACE_SILK]  49.78,35 270 top
PWR_LED3  JUMPER-SMT_2_NC_TRACE_SILK  [SMT-JUMPER_2_NC_TRACE_SILK]  94.74,35 270 top
PWR_LED4  JUMPER-SMT_2_NC_TRACE_SILK  [SMT-JUMPER_2_NC_TRACE_SILK]  49.78,57.05 270 top
PWR_LED5  JUMPER-SMT_2_NC_TRACE_SILK  [SMT-JUMPER_2_NC_TRACE_SILK]  94.74,57.05 270 top
PWR_LED6  JUMPER-SMT_2_NC_TRACE_SILK  [SMT-JUMPER_2_NC_TRACE_SILK]  49.78,79.1 270 top
PWR_LED7  JUMPER-SMT_2_NC_TRACE_SILK  [SMT-JUMPER_2_NC_TRACE_SILK]  94.74,79.1 270 top
PWR_LED8  JUMPER-SMT_2_NC_TRACE_SILK  [SMT-JUMPER_2_NC_TRACE_SILK]  49.78,101.14 270 top
PWR_LED9  JUMPER-SMT_2_NC_TRACE_SILK  [SMT-JUMPER_2_NC_TRACE_SILK]  94.74,101.14 270 top
PWR_LED10  JUMPER-SMT_2_NC_TRACE_SILK  [SMT-JUMPER_2_NC_TRACE_SILK]  49.78,123.19 270 top
PWR_LED11  JUMPER-SMT_2_NC_TRACE_SILK  [SMT-JUMPER_2_NC_TRACE_SILK]  94.74,123.19 270 top
PWR_LED12  JUMPER-SMT_2_NC_TRACE_SILK  [SMT-JUMPER_2_NC_TRACE_SILK]  49.78,145.24 270 top
PWR_LED13  JUMPER-SMT_2_NC_TRACE_SILK  [SMT-JUMPER_2_NC_TRACE_SILK]  94.74,145.24 270 top
PWR_LED14  JUMPER-SMT_2_NC_TRACE_SILK  [SMT-JUMPER_2_NC_TRACE_SILK]  49.78,167.28 270 top
PWR_LED15  JUMPER-SMT_2_NC_TRACE_SILK  [SMT-JUMPER_2_NC_TRACE_SILK]  94.74,167.28 270 top
Q1  600mA/40V  [SOT23-3]  28.45,25.91 0 top
Q2  600mA/40V  [SOT23-3]  73.41,25.91 0 top
Q3  600mA/40V  [SOT23-3]  28.45,47.96 0 top
Q4  600mA/40V  [SOT23-3]  73.41,47.96 0 top
Q5  600mA/40V  [SOT23-3]  28.45,70 0 top
Q6  600mA/40V  [SOT23-3]  73.41,70 0 top
Q7  600mA/40V  [SOT23-3]  28.45,92.05 0 top
Q8  600mA/40V  [SOT23-3]  73.41,92.05 0 top
Q9  600mA/40V  [SOT23-3]  28.45,114.1 0 top
Q10  600mA/40V  [SOT23-3]  73.41,114.1 0 top
Q11  600mA/40V  [SOT23-3]  28.45,136.14 0 top
Q12  600mA/40V  [SOT23-3]  73.41,136.14 0 top
Q13  600mA/40V  [SOT23-3]  28.45,158.19 0 top
Q14  600mA/40V  [SOT23-3]  73.41,158.19 0 top
Q15  600mA/40V  [SOT23-3]  28.45,180.24 0 top
Q16  600mA/40V  [SOT23-3]  73.41,180.24 0 top
R1  10k  [0603]  11.18,25.91 90 top
R2  75k  [0603]  8.13,25.91 270 top
R3  4.7k  [0603]  20.83,25.91 0 top
R4  124k  [0603]  24.64,25.91 0 top
R5  3.9k  [0603]  24.64,23.37 180 top
R6  10k  [0603]  20.83,23.37 0 top
R7  2.2M  [0603]  24.64,16.76 180 top
R8  1k  [0603]  30.73,25.91 90 top
R9  124k  [0603]  24.64,13.21 180 top
R10  4.7k  [0603]  43.69,9.14 0 top
R11  10k  [0603]  32.26,14.48 0 top
R12  10k  [0603]  24.64,15.24 180 top
R13  75k  [0603]  9.4,15.88 0 top
R14  220  [0603]  13.97,11.18 0 top
R15  6.8k  [0603]  20.83,18.29 180 top
R16  75k  [0603]  20.83,20.83 180 top
R17  10k  [0603]  20.7,13.21 0 top
R18  10k  [0603]  12.83,15.88 0 top
R19  10k  [0603]  56.13,25.91 90 top
R20  10k  [0603]  32.51,25.91 270 top
R21  75k  [0603]  53.09,25.91 270 top
R22  4.7k  [0603]  43.69,12.19 0 top
R23  4.7k  [0603]  43.69,10.67 0 top
R24  100k  [0603]  24.64,20.83 0 top
R25  4.7k  [0603]  65.79,25.91 0 top
R26  124k  [0603]  69.6,25.91 0 top
R27  3.9k  [0603]  69.6,23.37 180 top
R28  10k  [0603]  65.79,23.37 0 top
R29  2.2M  [0603]  69.6,16.76 180 top
R30  124k  [0603]  69.6,13.21 180 top
R31  10k  [0603]  69.6,15.24 180 top
R32  75k  [0603]  54.36,15.88 0 top
R33  220  [0603]  58.93,11.18 0 top
R34  6.8k  [0603]  65.79,18.29 180 top
R35  75k  [0603]  65.79,20.83 180 top
R36  10k  [0603]  65.66,13.21 0 top
R37  10k  [0603]  57.78,15.88 0 top
R38  4.7k  [0603]  88.65,12.19 0 top
R39  4.7k  [0603]  88.65,10.67 0 top
R40  1k  [0603]  75.69,25.91 90 top
R41  10k  [0603]  77.22,14.48 0 top
R42  10k  [0603]  77.47,25.91 270 top
R43  100k  [0603]  69.6,20.83 0 top
R44  4.7k  [0603]  88.65,9.14 0 top
R45  10k  [0603]  11.18,47.96 90 top
R46  75k  [0603]  8.13,47.96 270 top
R47  4.7k  [0603]  20.83,47.96 0 top
R48  124k  [0603]  24.64,47.96 0 top
R49  3.9k  [0603]  24.64,45.42 180 top
R50  10k  [0603]  20.83,45.42 0 top
R51  2.2M  [0603]  24.64,38.81 180 top
R52  124k  [0603]  24.64,35.26 180 top
R53  10k  [0603]  24.64,37.29 180 top
R54  75k  [0603]  9.4,37.92 0 top
R55  220  [0603]  13.97,33.22 0 top
R56  6.8k  [0603]  20.83,40.34 180 top
R57  75k  [0603]  20.83,42.88 180 top
R58  10k  [0603]  20.7,35.26 0 top
R59  10k  [0603]  12.83,37.92 0 top
R60  4.7k  [0603]  43.69,34.24 0 top
R61  4.7k  [0603]  43.69,32.72 0 top
R62  1k  [0603]  30.73,47.96 90 top
R63  10k  [0603]  32.26,36.53 0 top
R64  10k  [0603]  32.51,47.96 270 top
R65  100k  [0603]  24.64,42.88 0 top
R66  4.7k  [0603]  43.69,31.19 0 top
R67  10k  [0603]  56.13,47.96 90 top
R68  75k  [0603]  53.09,47.96 270 top
R69  4.7k  [0603]  65.79,47.96 0 top
R70  124k  [0603]  69.6,47.96 0 top
R71  3.9k  [0603]  69.6,45.42 180 top
R72  10k  [0603]  65.79,45.42 0 top
R73  2.2M  [0603]  69.6,38.81 180 top
R74  124k  [0603]  69.6,35.26 180 top
R75  10k  [0603]  69.6,37.29 180 top
R76  75k  [0603]  54.36,37.92 0 top
R77  220  [0603]  58.93,33.22 0 top
R78  6.8k  [0603]  65.79,40.34 180 top
R79  75k  [0603]  65.79,42.88 180 top
R80  10k  [0603]  65.66,35.26 0 top
R81  10k  [0603]  57.78,37.92 0 top
R82  4.7k  [0603]  88.65,34.24 0 top
R83  4.7k  [0603]  88.65,32.72 0 top
R84  1k  [0603]  75.69,47.96 90 top
R85  10k  [0603]  77.22,36.53 0 top
R86  10k  [0603]  77.47,47.96 270 top
R87  100k  [0603]  69.6,42.88 0 top
R88  4.7k  [0603]  88.65,31.19 0 top
R89  10k  [0603]  11.18,70 90 top
R90  75k  [0603]  8.13,70 270 top
R91  4.7k  [0603]  20.83,70 0 top
R92  124k  [0603]  24.64,70 0 top
R93  3.9k  [0603]  24.64,67.46 180 top
R94  10k  [0603]  20.83,67.46 0 top
R95  2.2M  [0603]  24.64,60.86 180 top
R96  124k  [0603]  24.64,57.3 180 top
R97  10k  [0603]  24.64,59.33 180 top
R98  75k  [0603]  9.4,59.97 0 top
R99  220  [0603]  13.97,55.27 0 top
R100  6.8k  [0603]  20.83,62.38 180 top
R101  75k  [0603]  20.83,64.92 180 top
R102  10k  [0603]  20.7,57.3 0 top
R103  10k  [0603]  12.83,59.97 0 top
R104  4.7k  [0603]  43.69,56.29 0 top
R105  4.7k  [0603]  43.69,54.76 0 top
R106  1k  [0603]  30.73,70 90 top
R107  10k  [0603]  32.26,58.57 0 top
R108  10k  [0603]  32.51,70 270 top
R109  100k  [0603]  24.64,64.92 0 top
R110  4.7k  [0603]  43.69,53.24 0 top
R111  10k  [0603]  56.13,70 90 top
R112  75k  [0603]  53.09,70 270 top
R113  4.7k  [0603]  65.79,70 0 top
R114  124k  [0603]  69.6,70 0 top
R115  3.9k  [0603]  69.6,67.46 180 top
R116  10k  [0603]  65.79,67.46 0 top
R117  2.2M  [0603]  69.6,60.86 180 top
R118  124k  [0603]  69.6,57.3 180 top
R119  10k  [0603]  69.6,59.33 180 top
R120  75k  [0603]  54.36,59.97 0 top
R121  220  [0603]  58.93,55.27 0 top
R122  6.8k  [0603]  65.79,62.38 180 top
R123  75k  [0603]  65.79,64.92 180 top
R124  10k  [0603]  65.66,57.3 0 top
R125  10k  [0603]  57.78,59.97 0 top
R126  4.7k  [0603]  88.65,56.29 0 top
R127  4.7k  [0603]  88.65,54.76 0 top
R128  1k  [0603]  75.69,70 90 top
R129  10k  [0603]  77.22,58.57 0 top
R130  10k  [0603]  77.47,70 270 top
R131  100k  [0603]  69.6,64.92 0 top
R132  4.7k  [0603]  88.65,53.24 0 top
R133  10k  [0603]  11.18,92.05 90 top
R134  75k  [0603]  8.13,92.05 270 top
R135  4.7k  [0603]  20.83,92.05 0 top
R136  124k  [0603]  24.64,92.05 0 top
R137  3.9k  [0603]  24.64,89.51 180 top
R138  10k  [0603]  20.83,89.51 0 top
R139  2.2M  [0603]  24.64,82.91 180 top
R140  124k  [0603]  24.64,79.35 180 top
R141  10k  [0603]  24.64,81.38 180 top
R142  75k  [0603]  9.4,82.02 0 top
R143  220  [0603]  13.97,77.32 0 top
R144  6.8k  [0603]  20.83,84.43 180 top
R145  75k  [0603]  20.83,86.97 180 top
R146  10k  [0603]  20.7,79.35 0 top
R147  10k  [0603]  12.83,82.02 0 top
R148  4.7k  [0603]  43.69,78.33 0 top
R149  4.7k  [0603]  43.69,76.81 0 top
R150  1k  [0603]  30.73,92.05 90 top
R151  10k  [0603]  32.26,80.62 0 top
R152  10k  [0603]  32.51,92.05 270 top
R153  100k  [0603]  24.64,86.97 0 top
R154  4.7k  [0603]  43.69,75.29 0 top
R155  10k  [0603]  56.13,92.05 90 top
R156  75k  [0603]  53.09,92.05 270 top
R157  4.7k  [0603]  65.79,92.05 0 top
R158  124k  [0603]  69.6,92.05 0 top
R159  3.9k  [0603]  69.6,89.51 180 top
R160  10k  [0603]  65.79,89.51 0 top
R161  2.2M  [0603]  69.6,82.91 180 top
R162  124k  [0603]  69.6,79.35 180 top
R163  10k  [0603]  69.6,81.38 180 top
R164  75k  [0603]  54.36,82.02 0 top
R165  220  [0603]  58.93,77.32 0 top
R166  6.8k  [0603]  65.79,84.43 180 top
R167  75k  [0603]  65.79,86.97 180 top
R168  10k  [0603]  65.66,79.35 0 top
R169  10k  [0603]  57.78,82.02 0 top
R170  4.7k  [0603]  88.65,78.33 0 top
R171  4.7k  [0603]  88.65,76.81 0 top
R172  1k  [0603]  75.69,92.05 90 top
R173  10k  [0603]  77.22,80.62 0 top
R174  10k  [0603]  77.47,92.05 270 top
R175  100k  [0603]  69.6,86.97 0 top
R176  4.7k  [0603]  88.65,75.29 0 top
R177  10k  [0603]  11.18,114.1 90 top
R178  75k  [0603]  8.13,114.1 270 top
R179  4.7k  [0603]  20.83,114.1 0 top
R180  124k  [0603]  24.64,114.1 0 top
R181  3.9k  [0603]  24.64,111.56 180 top
R182  10k  [0603]  20.83,111.56 0 top
R183  2.2M  [0603]  24.64,104.95 180 top
R184  124k  [0603]  24.64,101.4 180 top
R185  10k  [0603]  24.64,103.43 180 top
R186  75k  [0603]  9.4,104.06 0 top
R187  220  [0603]  13.97,99.36 0 top
R188  6.8k  [0603]  20.83,106.48 180 top
R189  75k  [0603]  20.83,109.02 180 top
R190  10k  [0603]  20.7,101.4 0 top
R191  10k  [0603]  12.83,104.06 0 top
R192  4.7k  [0603]  43.69,100.38 0 top
R193  4.7k  [0603]  43.69,98.86 0 top
R194  1k  [0603]  30.73,114.1 90 top
R195  10k  [0603]  32.26,102.67 0 top
R196  10k  [0603]  32.51,114.1 270 top
R197  100k  [0603]  24.64,109.02 0 top
R198  4.7k  [0603]  43.69,97.33 0 top
R199  10k  [0603]  56.13,114.1 90 top
R200  75k  [0603]  53.09,114.1 270 top
R201  4.7k  [0603]  65.79,114.1 0 top
R202  124k  [0603]  69.6,114.1 0 top
R203  3.9k  [0603]  69.6,111.56 180 top
R204  10k  [0603]  65.79,111.56 0 top
R205  2.2M  [0603]  69.6,104.95 180 top
R206  124k  [0603]  69.6,101.4 180 top
R207  10k  [0603]  69.6,103.43 180 top
R208  75k  [0603]  54.36,104.06 0 top
R209  220  [0603]  58.93,99.36 0 top
R210  6.8k  [0603]  65.79,106.48 180 top
R211  75k  [0603]  65.79,109.02 180 top
R212  10k  [0603]  65.66,101.4 0 top
R213  10k  [0603]  57.78,104.06 0 top
R214  4.7k  [0603]  88.65,100.38 0 top
R215  4.7k  [0603]  88.65,98.86 0 top
R216  1k  [0603]  75.69,114.1 90 top
R217  10k  [0603]  77.22,102.67 0 top
R218  10k  [0603]  77.47,114.1 270 top
R219  100k  [0603]  69.6,109.02 0 top
R220  4.7k  [0603]  88.65,97.33 0 top
R221  10k  [0603]  11.18,136.14 90 top
R222  75k  [0603]  8.13,136.14 270 top
R223  4.7k  [0603]  20.83,136.14 0 top
R224  124k  [0603]  24.64,136.14 0 top
R225  3.9k  [0603]  24.64,133.6 180 top
R226  10k  [0603]  20.83,133.6 0 top
R227  2.2M  [0603]  24.64,127 180 top
R228  124k  [0603]  24.64,123.44 180 top
R229  10k  [0603]  24.64,125.48 180 top
R230  75k  [0603]  9.4,126.11 0 top
R231  220  [0603]  13.97,121.41 0 top
R232  6.8k  [0603]  20.83,128.52 180 top
R233  75k  [0603]  20.83,131.06 180 top
R234  10k  [0603]  20.7,123.44 0 top
R235  10k  [0603]  12.83,126.11 0 top
R236  4.7k  [0603]  43.69,122.43 0 top
R237  4.7k  [0603]  43.69,120.9 0 top
R238  1k  [0603]  30.73,136.14 90 top
R239  10k  [0603]  32.26,124.71 0 top
R240  10k  [0603]  32.51,136.14 270 top
R241  100k  [0603]  24.64,131.06 0 top
R242  4.7k  [0603]  43.69,119.38 0 top
R243  10k  [0603]  56.13,136.14 90 top
R244  75k  [0603]  53.09,136.14 270 top
R245  4.7k  [0603]  65.79,136.14 0 top
R246  124k  [0603]  69.6,136.14 0 top
R247  3.9k  [0603]  69.6,133.6 180 top
R248  10k  [0603]  65.79,133.6 0 top
R249  2.2M  [0603]  69.6,127 180 top
R250  124k  [0603]  69.6,123.44 180 top
R251  10k  [0603]  69.6,125.48 180 top
R252  75k  [0603]  54.36,126.11 0 top
R253  220  [0603]  58.93,121.41 0 top
R254  6.8k  [0603]  65.79,128.52 180 top
R255  75k  [0603]  65.79,131.06 180 top
R256  10k  [0603]  65.66,123.44 0 top
R257  10k  [0603]  57.78,126.11 0 top
R258  4.7k  [0603]  88.65,122.43 0 top
R259  4.7k  [0603]  88.65,120.9 0 top
R260  1k  [0603]  75.69,136.14 90 top
R261  10k  [0603]  77.22,124.71 0 top
R262  10k  [0603]  77.47,136.14 270 top
R263  100k  [0603]  69.6,131.06 0 top
R264  4.7k  [0603]  88.65,119.38 0 top
R265  10k  [0603]  11.18,158.19 90 top
R266  75k  [0603]  8.13,158.19 270 top
R267  4.7k  [0603]  20.83,158.19 0 top
R268  124k  [0603]  24.64,158.19 0 top
R269  3.9k  [0603]  24.64,155.65 180 top
R270  10k  [0603]  20.83,155.65 0 top
R271  2.2M  [0603]  24.64,149.05 180 top
R272  124k  [0603]  24.64,145.49 180 top
R273  10k  [0603]  24.64,147.52 180 top
R274  75k  [0603]  9.4,148.16 0 top
R275  220  [0603]  13.97,143.46 0 top
R276  6.8k  [0603]  20.83,150.57 180 top
R277  75k  [0603]  20.83,153.11 180 top
R278  10k  [0603]  20.7,145.49 0 top
R279  10k  [0603]  12.83,148.16 0 top
R280  4.7k  [0603]  43.69,144.48 0 top
R281  4.7k  [0603]  43.69,142.95 0 top
R282  1k  [0603]  30.73,158.19 90 top
R283  10k  [0603]  32.26,146.76 0 top
R284  10k  [0603]  32.51,158.19 270 top
R285  100k  [0603]  24.64,153.11 0 top
R286  4.7k  [0603]  43.69,141.43 0 top
R287  10k  [0603]  56.13,158.19 90 top
R288  75k  [0603]  53.09,158.19 270 top
R289  4.7k  [0603]  65.79,158.19 0 top
R290  124k  [0603]  69.6,158.19 0 top
R291  3.9k  [0603]  69.6,155.65 180 top
R292  10k  [0603]  65.79,155.65 0 top
R293  2.2M  [0603]  69.6,149.05 180 top
R294  124k  [0603]  69.6,145.49 180 top
R295  10k  [0603]  69.6,147.52 180 top
R296  75k  [0603]  54.36,148.16 0 top
R297  220  [0603]  58.93,143.46 0 top
R298  6.8k  [0603]  65.79,150.57 180 top
R299  75k  [0603]  65.79,153.11 180 top
R300  10k  [0603]  65.66,145.49 0 top
R301  10k  [0603]  57.78,148.16 0 top
R302  4.7k  [0603]  88.65,144.48 0 top
R303  4.7k  [0603]  88.65,142.95 0 top
R304  1k  [0603]  75.69,158.19 90 top
R305  10k  [0603]  77.22,146.76 0 top
R306  10k  [0603]  77.47,158.19 270 top
R307  100k  [0603]  69.6,153.11 0 top
R308  4.7k  [0603]  88.65,141.43 0 top
R309  10k  [0603]  11.18,180.24 90 top
R310  75k  [0603]  8.13,180.24 270 top
R311  4.7k  [0603]  20.83,180.24 0 top
R312  124k  [0603]  24.64,180.24 0 top
R313  3.9k  [0603]  24.64,177.7 180 top
R314  10k  [0603]  20.83,177.7 0 top
R315  2.2M  [0603]  24.64,171.09 180 top
R316  124k  [0603]  24.64,167.54 180 top
R317  10k  [0603]  24.64,169.57 180 top
R318  75k  [0603]  9.4,170.21 0 top
R319  220  [0603]  13.97,165.51 0 top
R320  6.8k  [0603]  20.83,172.62 180 top
R321  75k  [0603]  20.83,175.16 180 top
R322  10k  [0603]  20.7,167.54 0 top
R323  10k  [0603]  12.83,170.21 0 top
R324  4.7k  [0603]  43.69,166.52 0 top
R325  4.7k  [0603]  43.69,165 0 top
R326  1k  [0603]  30.73,180.24 90 top
R327  10k  [0603]  32.26,168.81 0 top
R328  10k  [0603]  32.51,180.24 270 top
R329  100k  [0603]  24.64,175.16 0 top
R330  4.7k  [0603]  43.69,163.47 0 top
R331  10k  [0603]  56.13,180.24 90 top
R332  75k  [0603]  53.09,180.24 270 top
R333  4.7k  [0603]  65.79,180.24 0 top
R334  124k  [0603]  69.6,180.24 0 top
R335  3.9k  [0603]  69.6,177.7 180 top
R336  10k  [0603]  65.79,177.7 0 top
R337  2.2M  [0603]  69.6,171.09 180 top
R338  124k  [0603]  69.6,167.54 180 top
R339  10k  [0603]  69.6,169.57 180 top
R340  75k  [0603]  54.36,170.21 0 top
R341  220  [0603]  58.93,165.51 0 top
R342  6.8k  [0603]  65.79,172.62 180 top
R343  75k  [0603]  65.79,175.16 180 top
R344  10k  [0603]  65.66,167.54 0 top
R345  10k  [0603]  57.78,170.21 0 top
R346  4.7k  [0603]  88.65,166.52 0 top
R347  4.7k  [0603]  88.65,165 0 top
R348  1k  [0603]  75.69,180.24 90 top
R349  10k  [0603]  77.22,168.81 0 top
R350  10k  [0603]  77.47,180.24 270 top
R351  100k  [0603]  69.6,175.16 0 top
R352  4.7k  [0603]  88.65,163.47 0 top
TP1  TEST-POINT3X5  [PAD.03X.05]  37.34,24.64 0 top
TP2  TEST-POINT3X5  [PAD.03X.05]  37.34,17.02 0 top
TP3  TEST-POINT3X5  [PAD.03X.05]  29.72,11.94 0 top
TP4  TEST-POINT3X5  [PAD.03X.05]  37.34,22.1 0 top
TP5  TEST-POINT3X5  [PAD.03X.05]  37.34,14.48 0 top
TP6  TEST-POINT3X5  [PAD.03X.05]  37.34,19.56 0 top
TP7  TEST-POINT3X5  [PAD.03X.05]  82.3,24.64 0 top
TP8  TEST-POINT3X5  [PAD.03X.05]  82.3,17.02 0 top
TP9  TEST-POINT3X5  [PAD.03X.05]  74.68,11.94 0 top
TP10  TEST-POINT3X5  [PAD.03X.05]  82.3,22.1 0 top
TP11  TEST-POINT3X5  [PAD.03X.05]  82.3,14.48 0 top
TP12  TEST-POINT3X5  [PAD.03X.05]  82.3,19.56 0 top
TP13  TEST-POINT3X5  [PAD.03X.05]  37.34,46.69 0 top
TP14  TEST-POINT3X5  [PAD.03X.05]  37.34,39.07 0 top
TP15  TEST-POINT3X5  [PAD.03X.05]  29.72,33.99 0 top
TP16  TEST-POINT3X5  [PAD.03X.05]  37.34,44.15 0 top
TP17  TEST-POINT3X5  [PAD.03X.05]  37.34,36.53 0 top
TP18  TEST-POINT3X5  [PAD.03X.05]  37.34,41.61 0 top
TP19  TEST-POINT3X5  [PAD.03X.05]  82.3,46.69 0 top
TP20  TEST-POINT3X5  [PAD.03X.05]  82.3,39.07 0 top
TP21  TEST-POINT3X5  [PAD.03X.05]  74.68,33.99 0 top
TP22  TEST-POINT3X5  [PAD.03X.05]  82.3,44.15 0 top
TP23  TEST-POINT3X5  [PAD.03X.05]  82.3,36.53 0 top
TP24  TEST-POINT3X5  [PAD.03X.05]  82.3,41.61 0 top
TP25  TEST-POINT3X5  [PAD.03X.05]  37.34,68.73 0 top
TP26  TEST-POINT3X5  [PAD.03X.05]  37.34,61.11 0 top
TP27  TEST-POINT3X5  [PAD.03X.05]  29.72,56.03 0 top
TP28  TEST-POINT3X5  [PAD.03X.05]  37.34,66.19 0 top
TP29  TEST-POINT3X5  [PAD.03X.05]  37.34,58.57 0 top
TP30  TEST-POINT3X5  [PAD.03X.05]  37.34,63.65 0 top
TP31  TEST-POINT3X5  [PAD.03X.05]  82.3,68.73 0 top
TP32  TEST-POINT3X5  [PAD.03X.05]  82.3,61.11 0 top
TP33  TEST-POINT3X5  [PAD.03X.05]  74.68,56.03 0 top
TP34  TEST-POINT3X5  [PAD.03X.05]  82.3,66.19 0 top
TP35  TEST-POINT3X5  [PAD.03X.05]  82.3,58.57 0 top
TP36  TEST-POINT3X5  [PAD.03X.05]  82.3,63.65 0 top
TP37  TEST-POINT3X5  [PAD.03X.05]  37.34,90.78 0 top
TP38  TEST-POINT3X5  [PAD.03X.05]  37.34,83.16 0 top
TP39  TEST-POINT3X5  [PAD.03X.05]  29.72,78.08 0 top
TP40  TEST-POINT3X5  [PAD.03X.05]  37.34,88.24 0 top
TP41  TEST-POINT3X5  [PAD.03X.05]  37.34,80.62 0 top
TP42  TEST-POINT3X5  [PAD.03X.05]  37.34,85.7 0 top
TP43  TEST-POINT3X5  [PAD.03X.05]  82.3,90.78 0 top
TP44  TEST-POINT3X5  [PAD.03X.05]  82.3,83.16 0 top
TP45  TEST-POINT3X5  [PAD.03X.05]  74.68,78.08 0 top
TP46  TEST-POINT3X5  [PAD.03X.05]  82.3,88.24 0 top
TP47  TEST-POINT3X5  [PAD.03X.05]  82.3,80.62 0 top
TP48  TEST-POINT3X5  [PAD.03X.05]  82.3,85.7 0 top
TP49  TEST-POINT3X5  [PAD.03X.05]  37.34,112.83 0 top
TP50  TEST-POINT3X5  [PAD.03X.05]  37.34,105.21 0 top
TP51  TEST-POINT3X5  [PAD.03X.05]  29.72,100.13 0 top
TP52  TEST-POINT3X5  [PAD.03X.05]  37.34,110.29 0 top
TP53  TEST-POINT3X5  [PAD.03X.05]  37.34,102.67 0 top
TP54  TEST-POINT3X5  [PAD.03X.05]  37.34,107.75 0 top
TP55  TEST-POINT3X5  [PAD.03X.05]  82.3,112.83 0 top
TP56  TEST-POINT3X5  [PAD.03X.05]  82.3,105.21 0 top
TP57  TEST-POINT3X5  [PAD.03X.05]  74.68,100.13 0 top
TP58  TEST-POINT3X5  [PAD.03X.05]  82.3,110.29 0 top
TP59  TEST-POINT3X5  [PAD.03X.05]  82.3,102.67 0 top
TP60  TEST-POINT3X5  [PAD.03X.05]  82.3,107.75 0 top
TP61  TEST-POINT3X5  [PAD.03X.05]  37.34,134.87 0 top
TP62  TEST-POINT3X5  [PAD.03X.05]  37.34,127.25 0 top
TP63  TEST-POINT3X5  [PAD.03X.05]  29.72,122.17 0 top
TP64  TEST-POINT3X5  [PAD.03X.05]  37.34,132.33 0 top
TP65  TEST-POINT3X5  [PAD.03X.05]  37.34,124.71 0 top
TP66  TEST-POINT3X5  [PAD.03X.05]  37.34,129.79 0 top
TP67  TEST-POINT3X5  [PAD.03X.05]  82.3,134.87 0 top
TP68  TEST-POINT3X5  [PAD.03X.05]  82.3,127.25 0 top
TP69  TEST-POINT3X5  [PAD.03X.05]  74.68,122.17 0 top
TP70  TEST-POINT3X5  [PAD.03X.05]  82.3,132.33 0 top
TP71  TEST-POINT3X5  [PAD.03X.05]  82.3,124.71 0 top
TP72  TEST-POINT3X5  [PAD.03X.05]  82.3,129.79 0 top
TP73  TEST-POINT3X5  [PAD.03X.05]  37.34,156.92 0 top
TP74  TEST-POINT3X5  [PAD.03X.05]  37.34,149.3 0 top
TP75  TEST-POINT3X5  [PAD.03X.05]  29.72,144.22 0 top
TP76  TEST-POINT3X5  [PAD.03X.05]  37.34,154.38 0 top
TP77  TEST-POINT3X5  [PAD.03X.05]  37.34,146.76 0 top
TP78  TEST-POINT3X5  [PAD.03X.05]  37.34,151.84 0 top
TP79  TEST-POINT3X5  [PAD.03X.05]  82.3,156.92 0 top
TP80  TEST-POINT3X5  [PAD.03X.05]  82.3,149.3 0 top
TP81  TEST-POINT3X5  [PAD.03X.05]  74.68,144.22 0 top
TP82  TEST-POINT3X5  [PAD.03X.05]  82.3,154.38 0 top
TP83  TEST-POINT3X5  [PAD.03X.05]  82.3,146.76 0 top
TP84  TEST-POINT3X5  [PAD.03X.05]  82.3,151.84 0 top
TP85  TEST-POINT3X5  [PAD.03X.05]  37.34,178.97 0 top
TP86  TEST-POINT3X5  [PAD.03X.05]  37.34,171.35 0 top
TP87  TEST-POINT3X5  [PAD.03X.05]  29.72,166.27 0 top
TP88  TEST-POINT3X5  [PAD.03X.05]  37.34,176.43 0 top
TP89  TEST-POINT3X5  [PAD.03X.05]  37.34,168.81 0 top
TP90  TEST-POINT3X5  [PAD.03X.05]  37.34,173.89 0 top
TP91  TEST-POINT3X5  [PAD.03X.05]  82.3,178.97 0 top
TP92  TEST-POINT3X5  [PAD.03X.05]  82.3,171.35 0 top
TP93  TEST-POINT3X5  [PAD.03X.05]  74.68,166.27 0 top
TP94  TEST-POINT3X5  [PAD.03X.05]  82.3,176.43 0 top
TP95  TEST-POINT3X5  [PAD.03X.05]  82.3,168.81 0 top
TP96  TEST-POINT3X5  [PAD.03X.05]  82.3,173.89 0 top
U1  LMV324  [SO14]  57.45,20.14 180 top
U2  STM8L051F3  [TSSOP20]  75.36,19.54 90 top
U3  SP3232EB  [TSSOP16]  91.19,20.07 0 top
U4  ULTRASONIC_SENSOR_TRANSMITTER  [CUSA-T80]  86.11,19.56 0 bottom
U5  ULTRASONIC_SENSOR_TRANSMITTER  [CUSA-T80]  41.15,19.56 0 bottom
U6  LMV324  [SO14]  12.49,20.14 180 top
U7  STM8L051F3  [TSSOP20]  30.4,19.54 90 top
U8  SP3232EB  [TSSOP16]  46.23,20.07 0 top
U9  ULTRASONIC_SENSOR_RECEIVER  [CUSA-R80]  17.02,19.56 180 bottom
U10  ULTRASONIC_SENSOR_RECEIVER  [CUSA-R80]  61.98,19.56 180 bottom
U11  LMV324  [SO14]  12.49,42.19 180 top
U12  STM8L051F3  [TSSOP20]  30.4,41.58 90 top
U13  SP3232EB  [TSSOP16]  46.23,42.11 0 top
U14  ULTRASONIC_SENSOR_TRANSMITTER  [CUSA-T80]  41.15,41.61 0 bottom
U15  ULTRASONIC_SENSOR_RECEIVER  [CUSA-R80]  17.02,41.61 180 bottom
U16  LMV324  [SO14]  57.45,42.19 180 top
U17  STM8L051F3  [TSSOP20]  75.36,41.58 90 top
U18  SP3232EB  [TSSOP16]  91.19,42.11 0 top
U19  ULTRASONIC_SENSOR_TRANSMITTER  [CUSA-T80]  86.11,41.61 0 bottom
U20  ULTRASONIC_SENSOR_RECEIVER  [CUSA-R80]  61.98,41.61 180 bottom
U21  LMV324  [SO14]  12.49,64.24 180 top
U22  STM8L051F3  [TSSOP20]  30.4,63.63 90 top
U23  SP3232EB  [TSSOP16]  46.23,64.16 0 top
U24  ULTRASONIC_SENSOR_TRANSMITTER  [CUSA-T80]  41.15,63.65 0 bottom
U25  ULTRASONIC_SENSOR_RECEIVER  [CUSA-R80]  17.02,63.65 180 bottom
U26  LMV324  [SO14]  57.45,64.24 180 top
U27  STM8L051F3  [TSSOP20]  75.36,63.63 90 top
U28  SP3232EB  [TSSOP16]  91.19,64.16 0 top
U29  ULTRASONIC_SENSOR_TRANSMITTER  [CUSA-T80]  86.11,63.65 0 bottom
U30  ULTRASONIC_SENSOR_RECEIVER  [CUSA-R80]  61.98,63.65 180 bottom
U31  LMV324  [SO14]  12.49,86.28 180 top
U32  STM8L051F3  [TSSOP20]  30.4,85.68 90 top
U33  SP3232EB  [TSSOP16]  46.23,86.21 0 top
U34  ULTRASONIC_SENSOR_TRANSMITTER  [CUSA-T80]  41.15,85.7 0 bottom
U35  ULTRASONIC_SENSOR_RECEIVER  [CUSA-R80]  17.02,85.7 180 bottom
U36  LMV324  [SO14]  57.45,86.28 180 top
U37  STM8L051F3  [TSSOP20]  75.36,85.68 90 top
U38  SP3232EB  [TSSOP16]  91.19,86.21 0 top
U39  ULTRASONIC_SENSOR_TRANSMITTER  [CUSA-T80]  86.11,85.7 0 bottom
U40  ULTRASONIC_SENSOR_RECEIVER  [CUSA-R80]  61.98,85.7 180 bottom
U41  LMV324  [SO14]  12.49,108.33 180 top
U42  STM8L051F3  [TSSOP20]  30.4,107.72 90 top
U43  SP3232EB  [TSSOP16]  46.23,108.25 0 top
U44  ULTRASONIC_SENSOR_TRANSMITTER  [CUSA-T80]  41.15,107.75 0 bottom
U45  ULTRASONIC_SENSOR_RECEIVER  [CUSA-R80]  17.02,107.75 180 bottom
U46  LMV324  [SO14]  57.45,108.33 180 top
U47  STM8L051F3  [TSSOP20]  75.36,107.72 90 top
U48  SP3232EB  [TSSOP16]  91.19,108.25 0 top
U49  ULTRASONIC_SENSOR_TRANSMITTER  [CUSA-T80]  86.11,107.75 0 bottom
U50  ULTRASONIC_SENSOR_RECEIVER  [CUSA-R80]  61.98,107.75 180 bottom
U51  LMV324  [SO14]  12.49,130.38 180 top
U52  STM8L051F3  [TSSOP20]  30.4,129.77 90 top
U53  SP3232EB  [TSSOP16]  46.23,130.3 0 top
U54  ULTRASONIC_SENSOR_TRANSMITTER  [CUSA-T80]  41.15,129.79 0 bottom
U55  ULTRASONIC_SENSOR_RECEIVER  [CUSA-R80]  17.02,129.79 180 bottom
U56  LMV324  [SO14]  57.45,130.38 180 top
U57  STM8L051F3  [TSSOP20]  75.36,129.77 90 top
U58  SP3232EB  [TSSOP16]  91.19,130.3 0 top
U59  ULTRASONIC_SENSOR_TRANSMITTER  [CUSA-T80]  86.11,129.79 0 bottom
U60  ULTRASONIC_SENSOR_RECEIVER  [CUSA-R80]  61.98,129.79 180 bottom
U61  LMV324  [SO14]  12.49,152.43 180 top
U62  STM8L051F3  [TSSOP20]  30.4,151.82 90 top
U63  SP3232EB  [TSSOP16]  46.23,152.35 0 top